# Allegro board PMU851_IS_L_V1_0_180330.brd
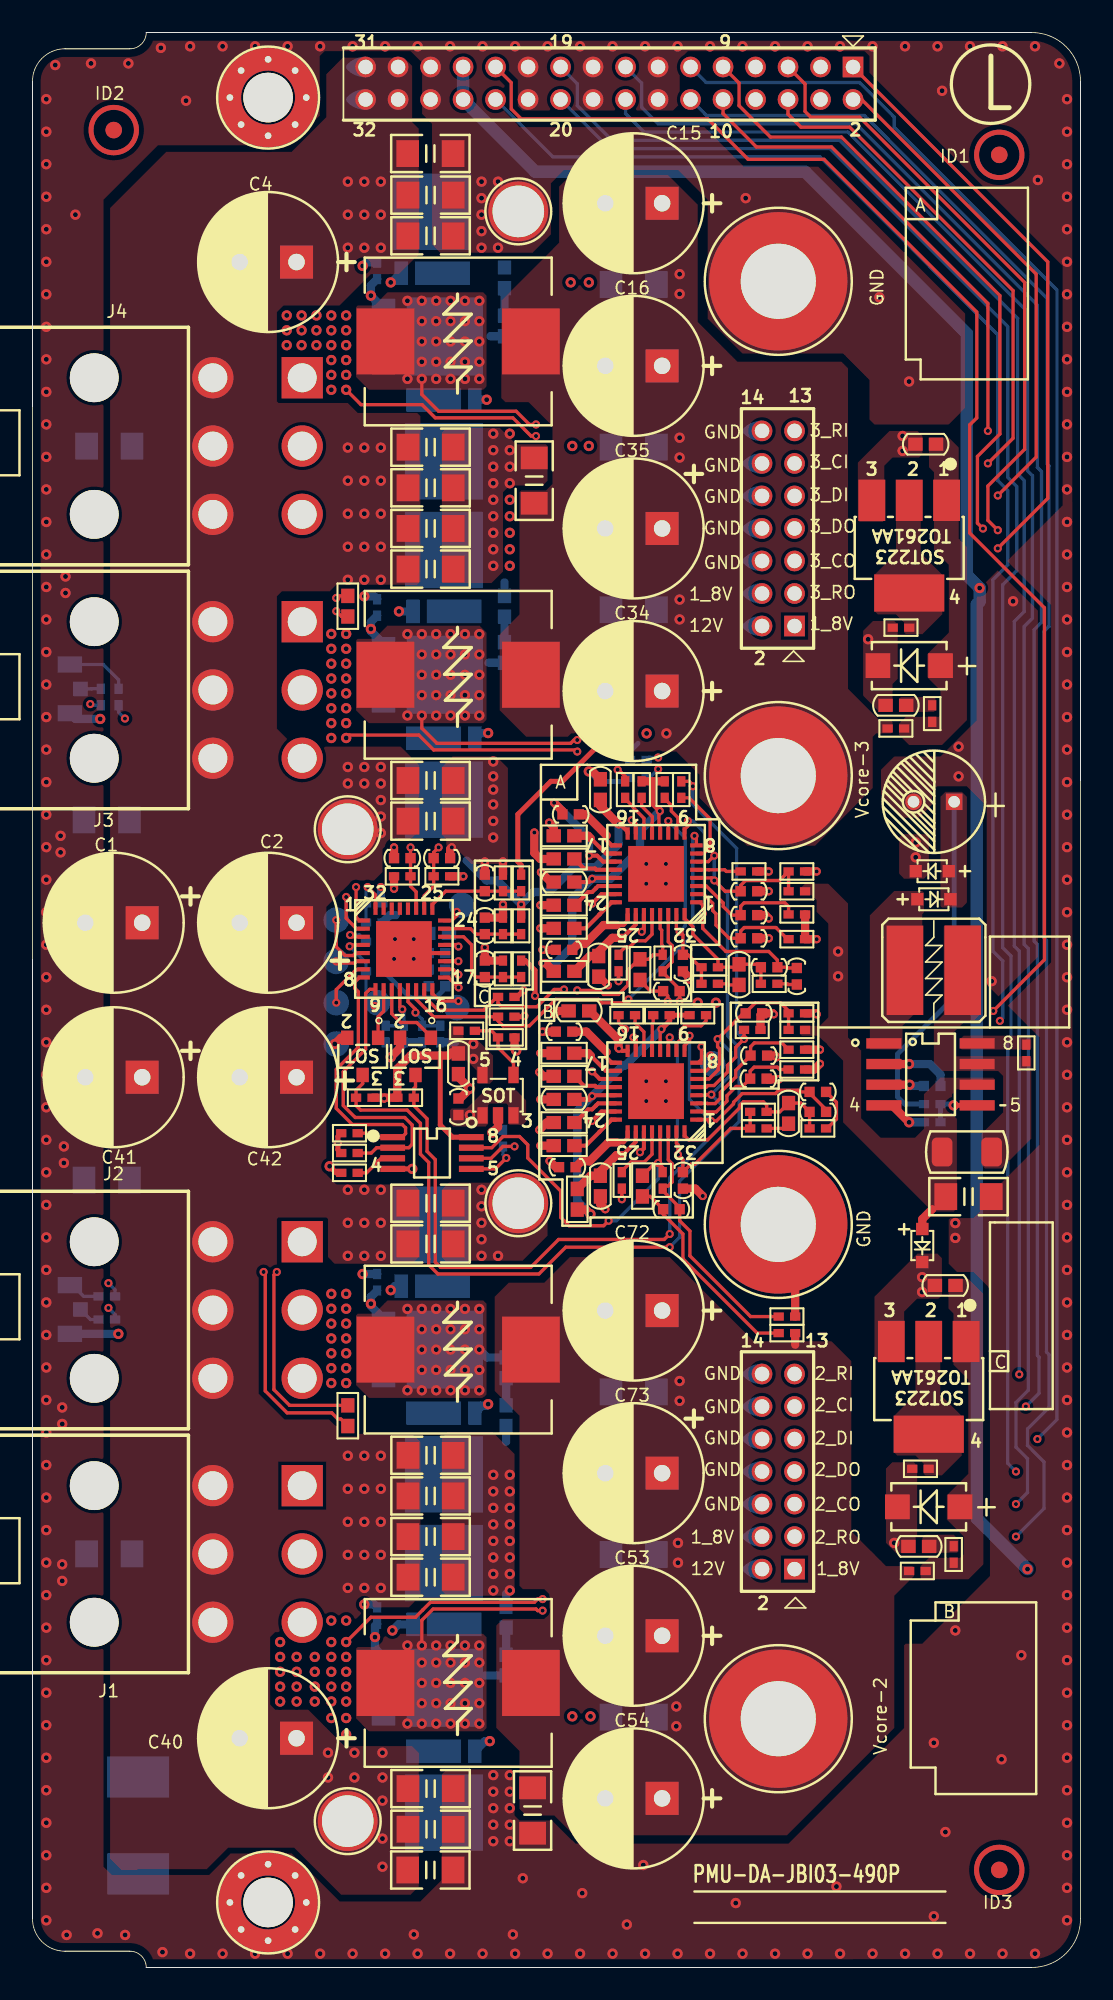
[diagram p0: board, top side]
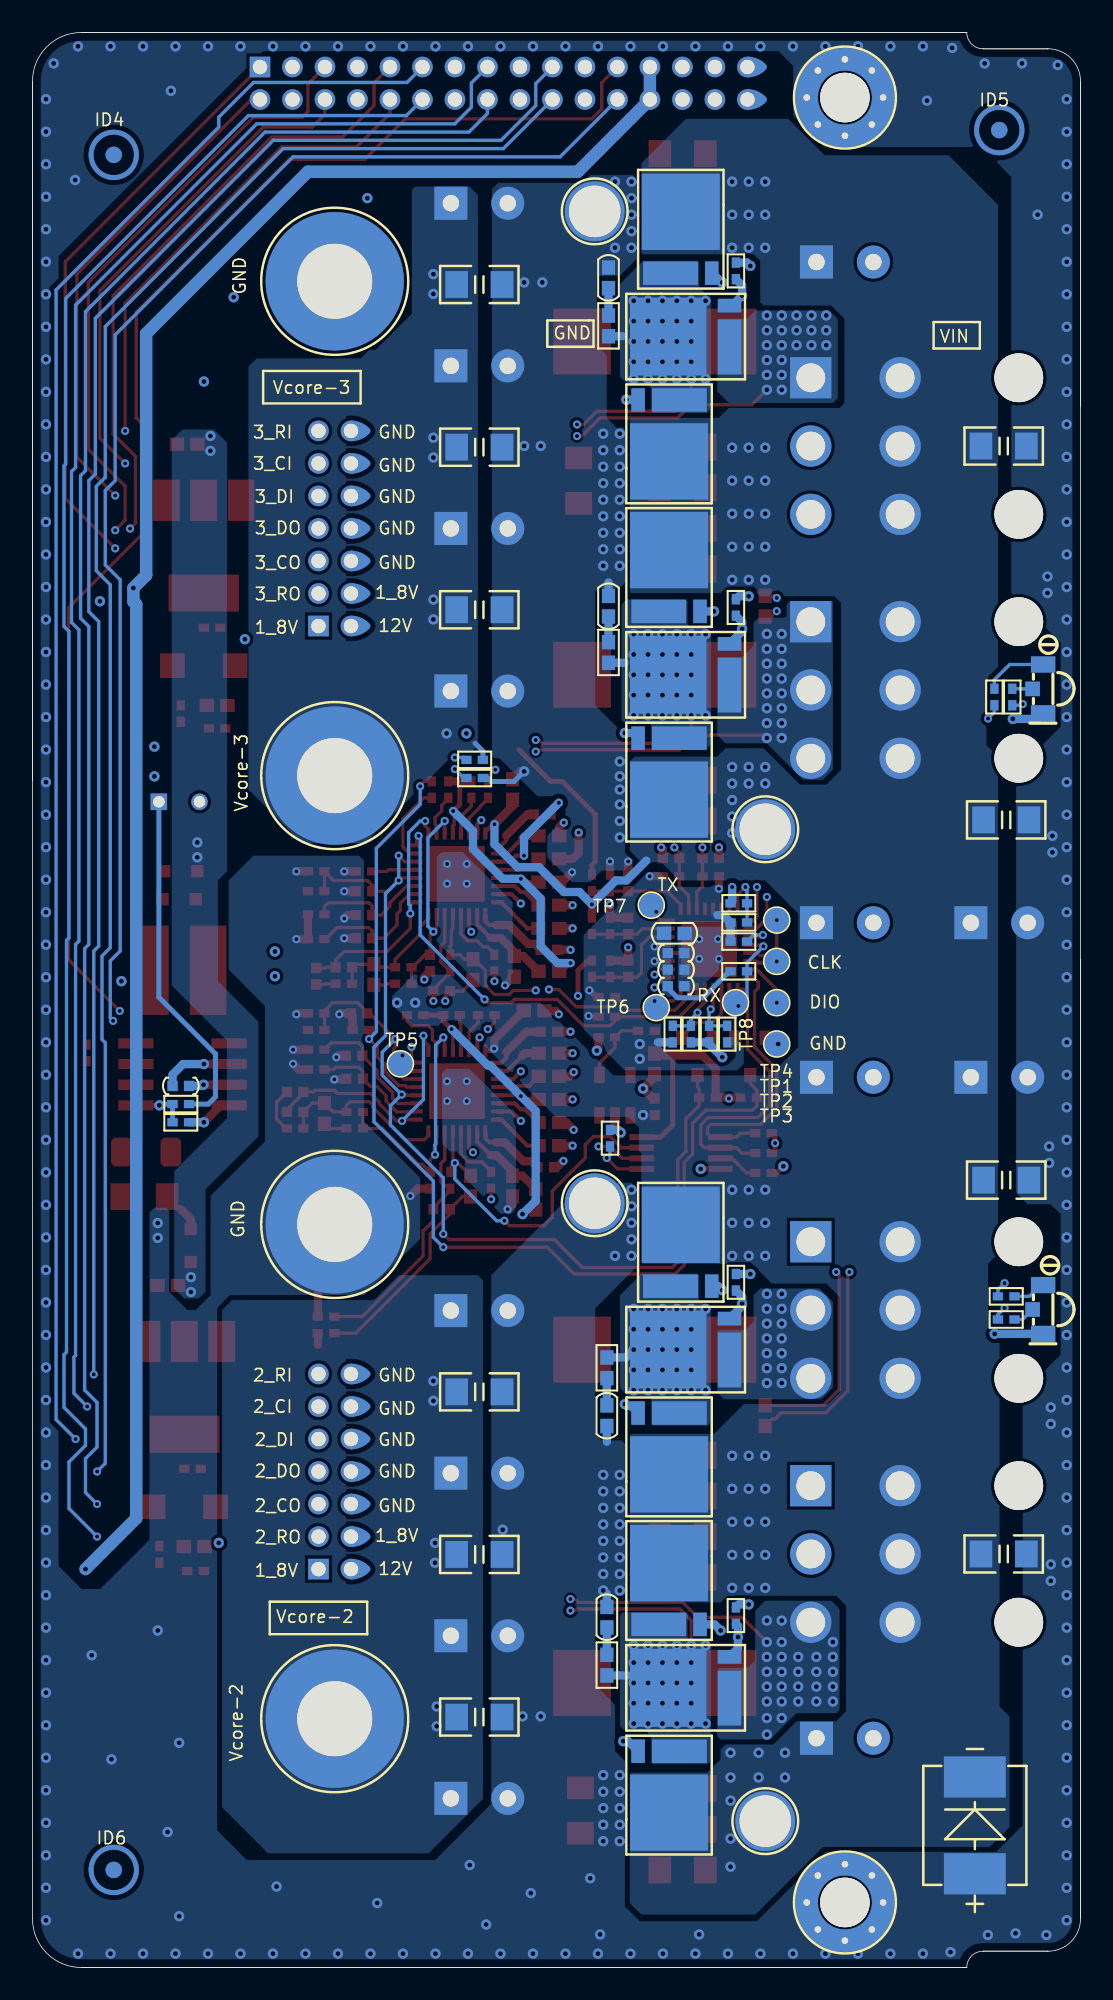
[diagram p1: board, bottom side, seen from below]

Outline 64.5 x 119 mm; copper layers: TOP, L2_INNER, L3_INNER, BOTTOM. Coordinates in mm from the lower left corner of the outline.
Outline path: 0,116 0,96 ; 0,116 arc(0.59,117.41) 2,118 ; 0,116 0,96 ; 0,96 0,62 ; 2,118 6,118 ; 2,118 6,118 ; 0,62 0,28 ; 0,62 0,28 ; 0,28 0,3 ; 0,28 0,3 ; 0,3 arc(0.59,1.59) 2,1 ; 6,118 arc(6.71,118.29) 7,119 ; 2,1 6,1 ; 2,1 6,1 ; 6,1 arc(6.71,0.71) 7,0 ; 7,0 61.5,0 ; 7,0 61.5,0 ; 7,119 61.5,119 ; 7,119 61.5,119 ; 61.5,119 arc(63.62,118.12) 64.5,116 ; 61.5,0 arc(63.62,0.88) 64.5,3 64.5,73 ; 64.5,116 64.5,73 ; 64.5,116 64.5,73

## Placement (name value [footprint] x y rotation side)
C1  270uF/16V  [CE-138-315-315]  5 64.25 0 top
C2  270uF/16V  [CE-138-315-315]  14.5 64.25 0 top
C4  270uF/16V  [CE-138-315-315]  14.5 104.88 0 top
C5  22uF/16V  [C1206]  4.57 48.42 0 bottom
C6  22uF/16V  [C1206]  24.49 111.56 180 top
C7  22uF/16V  [C1206]  4.73 93.57 0 bottom
C8  22uF/16V  [C1206]  24.5 106.5 180 top
C9  22uF/16V  [C1206]  24.5 109 180 top
C10  22uF/16V  [C1206]  24.5 91 180 top
C11  22uF/16V  [C1206]  24.5 93.5 180 top
C12  470nF/16V  [C0402]  32.72 62.59 90 top
C13  2.2uF/10V  [C0603]  34.85 61.57 90 top
C14  10uF/10V  [C0603]  32.72 66.75 0 top
C15  270uF/16V  [CE-138-315-315]  37 108.5 0 top
C16  270uF/16V  [CE-138-315-315]  37 98.5 0 top
C17  22uF/16V  [C1206]  30.88 91.44 270 top
C18  4.7nF/50V/NL  [C0603]  29.05 83.72 270 bottom
C19  10nF/16V  [C0402]  44.09 66.19 270 top
C20  22uF/16V  [C1206]  37 103.5 0 bottom
C21  4.7uF/16V  [C0603]  34.95 72.44 270 top
C22  1nF/50V  [C0402]  44.09 63.3 270 top
C23  150pF/50V  [C0402]  45.34 61.51 90 top
C24  2.2nF/50V  [C0402]  47.04 60.96 180 top
C25  1nF/50V  [C0402]  44.09 64.72 270 top
C26  15nF/25V  [C0603]  43.48 61.06 270 top
C27  100pF/50V  [C0402]  40.03 61.77 180 top
C28  22uF/16V  [C1206]  24.5 73 180 top
C29  22uF/16V  [C1206]  24.5 88.5 180 top
C30  22uF/16V  [C1206]  24.5 70.5 180 top
C31  22uF/16V  [C1206]  24.5 86 180 top
C32  100nF/16V  [C0402]  39.32 60.05 270 top
C33  470nF/16V  [C0402]  33.12 70.92 90 top
C34  270uF/16V  [CE-138-315-315]  37 78.5 0 top
C35  270uF/16V  [CE-138-315-315]  37 88.5 0 top
C36  22uF/16V  [C1206]  37 83.5 0 bottom
C37  22uF/16V  [C1206]  37 93.5 0 bottom
C38  4.7nF/50V/NL  [C0603]  29.05 103.91 270 bottom
C40  270uF/16V  [CE-138-315-315]  14.5 14.1 0 top
C41  270uF/16V  [CE-138-315-315]  5 54.75 0 top
C42  270uF/16V  [CE-138-315-315]  14.5 54.75 0 top
C43  22uF/16V  [C1206]  4.57 70.58 0 bottom
C44  22uF/16V  [C1206]  4.73 25.43 0 bottom
C45  22uF/16V  [C1206]  24.49 5.99 180 top
C46  22uF/16V  [C1206]  24.5 26.5 180 top
C47  22uF/16V  [C1206]  24.5 24 180 top
C48  22uF/16V  [C1206]  24.5 11 180 top
C49  22uF/16V  [C1206]  24.5 8.5 180 top
C50  470nF/16V  [C0402]  32.92 49.22 90 top
C51  2.2uF/10V  [C0603]  34.95 48.06 90 top
C52  10uF/10V  [C0603]  32.72 53.39 0 top
C53  270uF/16V  [CE-138-315-315]  37 20.4 0 top
C54  270uF/16V  [CE-138-315-315]  37 10.4 0 top
C55  22uF/16V  [C1206]  37 15.4 0 bottom
C56  22uF/16V  [C1206]  30.78 9.65 90 top
C57  4.7uF/16V  [C0603]  33.63 58.83 0 top
C58  4.7nF/50V/NL  [C0603]  29.15 21.54 270 bottom
C59  10nF/16V  [C0402]  44.4 58.68 270 top
C60  1nF/50V  [C0402]  44.68 54.66 270 top
C61  150pF/50V  [C0402]  48.33 52.62 90 top
C62  2.2nF/50V  [C0402]  48.33 53.85 270 top
C63  1nF/50V  [C0402]  44.7 56.08 270 top
C64  15nF/25V  [C0603]  46.53 52.53 270 top
C65  100pF/50V  [C0402]  40.03 48.41 180 top
C66  22uF/16V  [C1206]  24.5 47 180 top
C67  22uF/16V  [C1206]  24.5 44.5 180 top
C68  22uF/16V  [C1206]  24.5 31.5 180 top
C69  22uF/16V  [C1206]  24.5 29 180 top
C70  100nF/16V  [C0402]  39.32 46.63 270 top
C71  470nF/16V  [C0402]  32.72 57.55 90 top
C72  270uF/16V  [CE-138-315-315]  37 40.4 0 top
C73  270uF/16V  [CE-138-315-315]  37 30.4 0 top
C74  22uF/16V  [C1206]  37 25.4 0 bottom
C75  22uF/16V  [C1206]  37 35.4 0 bottom
C76  4.7nF/50V/NL  [C0603]  29.15 33.93 90 bottom
C77  100nF/16V  [C0402]  26.21 52.93 0 top
C78  2.2uF/10V  [C0603]  26.21 55.58 90 top
C79  100nF/16V  [C0402]  25.2 68.22 270 top
C80  100nF/16V  [C0402]  22.76 68.22 90 top
C81  100nF/16V  [C0402]  27.84 64.06 0 top
C82  100nF/16V  [C0402]  27.84 66.7 0 top
C83  100nF/16V  [C0402]  27.84 61.42 0 top
C84  100nF/16V  [C0402]  24.89 60.35 270 bottom
C85  100nF/16V  [C0402]  24.89 62.38 270 bottom
C86  100nF/16V  [C0402]  24.89 61.37 270 bottom
C88  10uF/10V  [C0603]  24.99 63.6 0 bottom
C93  1.0uF/25V  [C0603]  54.97 93.68 180 top
C94  10uF/6.3V  [C0603]  53.14 77.62 0 top
C95  1.0uF/25V  [C0603]  56.17 41.95 180 top
C96  10uF/6.3V  [C0603]  54.55 25.89 0 top
C205  100pF/50V  [C0402]  55.37 54.21 90 bottom
C207  22uF/25V  [C1206]  57.61 47.41 180 top
C208  100uF/25V  [DCC-98-248-236]  55.47 71.69 180 top
D1  LTST-S326KGJRKT  [LED_S326KGJRKT_P03]  2.3 78.63 180 bottom
D2  LTST-S326KGJRKT  [LED_S326KGJRKT_P03]  2.3 40.47 180 bottom
D28  NSR1020MW2  [SOD323-2-43S]  54.76 44.4 90 top
D29  NSR1020MW2  [SOD323-2-43S]  55.47 65.7 180 top
D30  NSR1020MW2  [SOD323-2-43S]  55.37 67.42 0 top
H1  Hole  [HOLE120CIR240NP]  14.5 4 0 top
H2  Hole  [HOLE120CIR240NP]  14.5 115 0 top
H3  Hole  [HOLE125CIR145D]  19.4 70 0 top
H5  Hole  [HOLE125CIR145D]  29.9 47 0 top
H6  Hole  [HOLE125CIR145D]  29.9 108 0 top
H7  Hole  [HOLE-M4-182-335]  45.9 45.7 0 top
H8  Hole  [HOLE-M4-182-335]  45.9 103.7 0 top
H9  Hole  [HOLE-M4-182-335]  45.9 73.3 0 top
H10  Hole  [HOLE-M4-182-335]  45.9 15.3 0 top
H11  Hole  [HOLE125CIR145D]  19.4 9 0 top
ID1  MISC_ID  [ID-MARK]  59.5 111.48 0 top
ID2  MISC_ID  [ID-MARK]  5 113 0 top
ID3  MISC_ID  [ID-MARK]  59.5 6 0 top
ID4  MISC_ID  [ID-MARK]  59.5 111.48 180 bottom
ID5  MISC_ID  [ID-MARK]  5 113 180 bottom
ID6  MISC_ID  [ID-MARK]  59.5 6 180 bottom
J1  HDR3x2  [HDR_3X2_P]  16.6 29.63 270 top
J2  HDR3x2  [HDR_3X2_P]  16.6 44.63 270 top
J3  HDR3x2  [HDR_3X2_P]  16.6 82.77 270 top
J4  HDR3x2  [HDR_3X2_P]  16.6 97.77 270 top
J5  CON14A  [HEAD2X7-79B]  45.9 88.5 0 top
J6  CON14A  [HEAD2X7-79B]  45.9 30.5 0 top
J7  CON_2X16  [HEAD2X16-79B]  35.5 115.88 90 top
L1  0.68uH  [IND_10X10_4]  26.2 79.5 0 top
L2  0.68uH  [IND_10X10_4]  26.2 100 0 top
L3  0.68uH  [IND_10X10_4]  26.2 17.5 0 top
L4  0.68uH  [IND_10X10_4]  26.2 38 0 top
L6  33uH  [PL0505-045]  55.47 61.33 180 top
NOREF  -  []  -79.04 -9.53 0 top
NOREF#2  -  []  3.05 39.47 90 top
NOREF#3  -  []  1.81 38.97 90 top
NOREF#4  -  []  1.8 41.43 0 top
NOREF#5  -  []  1.81 77.13 90 top
NOREF#6  -  []  3.05 77.63 90 top
NOREF#7  -  []  3.08 76.63 90 top
NOREF#8  -  []  2.1 78.97 0 top
NOREF#9  -  []  3.08 38.47 90 top
NOREF#10  -  []  2.1 40.81 0 top
NOREF#11  -  []  1.8 79.6 0 top
Q1  TPH1R403NL  [SOT669_TOSHIBA]  25.32 86.1 270 bottom
Q2  TPH1R403NL  [SOT669_TOSHIBA]  25.32 72.9 90 bottom
Q3  TPH1R403NL  [SOT669_TOSHIBA]  24.3 79.5 180 bottom
Q4  TPH1R403NL  [SOT669_TOSHIBA]  25.32 93.7 90 bottom
Q5  TPH1R403NL  [SOT669_TOSHIBA]  24.6 106.9 270 bottom
Q6  TPH1R403NL  [SOT669_TOSHIBA]  24.3 100.3 180 bottom
Q7  TPH1R403NL  [SOT669_TOSHIBA]  25.32 10.6 90 bottom
Q8  TPH1R403NL  [SOT669_TOSHIBA]  25.32 23.8 270 bottom
Q9  TPH1R403NL  [SOT669_TOSHIBA]  24.3 17.2 180 bottom
Q10  TPH1R403NL  [SOT669_TOSHIBA]  25.32 31.4 90 bottom
Q11  TPH1R403NL  [SOT669_TOSHIBA]  24.6 44.6 270 bottom
Q12  TPH1R403NL  [SOT669_TOSHIBA]  24.3 38 180 bottom
Q13  NTR4003N  [SOT23-3-43]  20.32 56.03 180 top
Q14  NTR4003N  [SOT23-3-43]  23.57 56.03 180 top
R1  2.2R  [R0603]  32.72 61.26 180 top
R2  0R  [R0402]  37.29 74.27 0 bottom
R3  732R/1%  [R0402]  36.07 61.77 270 top
R4  1R/NL  [R0603]  29.05 80.87 90 bottom
R5  15K/1%  [R0402]  47.04 66.19 180 top
R6  0R  [R0402]  37.29 73.15 0 bottom
R7  2K  [R0402]  21.21 83.64 90 bottom
R8  0R  [R0603]  32.72 63.91 180 top
R9  5.23K/1%  [R0402]  47.04 67.41 0 top
R10  0R  [R0603]  32.72 65.33 180 top
R11  10K/1%  [R0402]  47.04 63.24 0 top
R12  10K/1%  [R0402]  45.34 60.5 180 top
R13  10K/1%  [R0402]  47.04 64.77 0 top
R14  45.3R/1%  [R0402]  41.68 60.5 0 top
R15  1K/1%  [R0402]  41.68 61.51 0 top
R16  1.13K/1%  [R0603]  37.39 61.37 270 top
R17  78.7R/1%  [R0402]  38.79 61.77 270 top
R18  187K/1%  [R0402]  44.09 67.41 0 top
R19  0R  [R0603]  32.72 69.6 180 top
R20  0R/NL  [R0402]  39.93 72.44 270 top
R21  0R  [R0603]  32.72 68.17 180 top
R22  1R/NL  [R0603]  29.05 100.96 90 bottom
R23  732R/1%  [R0402]  36.47 72.44 90 top
R24  10K  [R0402]  37.49 72.44 270 top
R25  2K  [R0402]  21.21 104.34 90 bottom
R26  2.2R  [R0603]  33.53 47.24 270 top
R27  0R  [R0402]  46.43 39.01 180 top
R28  732R/1%  [R0402]  36.27 48.41 270 top
R29  1R/NL  [R0603]  29.15 18.6 90 bottom
R30  0R  [R0402]  46.43 40.03 180 top
R31  15K/1%  [R0402]  47.04 57.66 180 top
R32  5.23K/1%  [R0402]  47.04 58.68 0 top
R33  2K  [R0402]  21.21 21.64 90 bottom
R34  0R  [R0603]  32.72 50.54 180 top
R35  0R  [R0603]  32.72 51.96 180 top
R36  13.7K/1%  [R0402]  47.04 55.23 0 top
R37  10K/1%  [R0402]  48.33 51.6 180 top
R38  13.7K/1%  [R0402]  47.04 56.44 0 top
R39  45.3R/1%  [R0402]  44.68 51.6 0 top
R40  1K/1%  [R0402]  44.68 52.62 0 top
R41  1.13K/1%  [R0603]  37.54 48.06 270 top
R42  78.7R/1%  [R0402]  38.79 48.41 270 top
R44  0R  [R0603]  32.72 56.23 180 top
R46  0R  [R0603]  32.72 54.81 180 top
R47  1R/NL  [R0603]  29.15 36.88 270 bottom
R48  732R/1%  [R0402]  36.58 58.57 180 top
R49  10K  [R0402]  38.71 58.57 180 top
R50  2K  [R0402]  21.21 42.14 90 bottom
R51  4.7K  [R0402]  19.51 50.09 0 top
R52  4.7K  [R0402]  19.51 51.31 0 top
R53  220R  [R0402]  4.2 78.13 270 bottom
R54  220R  [R0402]  5.3 78.13 270 bottom
R55  220R  [R0402]  4.57 39.85 0 bottom
R56  220R  [R0402]  4.57 41.27 0 bottom
R57  4.53K/1%  [R0402]  19.51 48.87 180 top
R58  4.53K/1%  [R0402]  28.96 51 90 bottom
R61  4.7K/1%  [R0402]  26.72 57.61 180 top
R62  2.8K/1%  [R0402]  29.16 57.2 180 top
R63  10K/NL  [R0402]  20.42 53.49 0 top
R64  10K/NL  [R0402]  22.96 53.49 180 top
R65  820R/1%  [R0402]  25.2 67.11 180 top
R66  820R/1%  [R0402]  22.76 67.11 0 top
R67  10K  [R0402]  29.16 59.69 0 top
R68  10K  [R0402]  29.16 58.47 0 top
R69  20K/1%  [R0402]  30.07 64.06 90 top
R70  5.62K/1%  [R0402]  28.96 64.06 270 top
R71  43K/1%  [R0402]  30.07 66.7 90 top
R72  43K/1%  [R0402]  30.07 61.42 90 top
R73  20K/1%  [R0402]  28.96 66.7 270 top
R74  20K/1%  [R0402]  28.96 61.42 270 top
R75  47K  [R0402]  21.03 63.09 0 bottom
R76  47K  [R0402]  21.03 61.26 0 bottom
R77  10K/NL  [R0402]  23.98 57.4 90 bottom
R78  10K/NL  [R0402]  22.86 57.4 90 bottom
R79  0R/NL  [R0402]  40.94 58.57 0 top
R80  0R/NL  [R0402]  38.91 72.44 270 top
R81  187K/1%  [R0402]  44.3 57.66 0 top
R87  0R  [R0402]  53.14 76.2 0 top
R88  0R  [R0402]  55.37 77.11 90 top
R89  0R  [R0402]  53.45 82.4 180 top
R92  0R  [R0402]  54.46 24.38 180 top
R93  0R  [R0402]  56.69 25.4 90 top
R94  0R  [R0402]  54.65 30.67 180 top
R198  180R  [R0402]  61.16 56.25 90 top
R201  0.33R  [R1206]  57.51 50.15 180 top
R203  75K/1%  [R0402]  55.37 53.1 180 bottom
R204  7.32K/1%  [R0402]  55.37 51.98 180 bottom
R205  10K/NL  [R0402]  25.1 57.4 270 bottom
R206  10K/NL  [R0402]  21.74 57.4 270 bottom
R207  10K/NL  [R0402]  21.03 64.27 0 bottom
R208  10K/NL  [R0402]  21.03 65.45 180 bottom
RT1  NTC  [R0603]  19.41 33.93 90 top
RT2  NTC  [R0603]  19.41 83.72 270 top
TP1  TP  [SMD_TP_2]  18.69 61.87 180 bottom
TP2  TP  [SMD_TP_2]  18.69 59.33 180 bottom
TP3  TP  [SMD_TP_2]  18.69 56.79 180 bottom
TP4  TP  [SMD_TP_2]  18.69 64.41 180 bottom
TP5  TP  [SMD_TP_2]  41.86 55.58 0 bottom
TP6  TP  [SMD_TP_2]  26.11 59.03 180 bottom
TP7  TP  [SMD_TP_2]  26.42 65.33 180 bottom
TP8  TP  [SMD_TP_2]  21.23 59.33 180 bottom
TVS1  SMCJ16A  [D3224-105]  6.5 8.74 90 bottom
TVS5  SMAJ5.0A  [D2010-89]  53.96 80.06 180 top
TVS8  SMAJ5.0A  [D2010-89]  55.16 28.33 180 top
U1  ISL8120  [QFN32-050-0505-010-N]  38.38 67.26 180 top
U2  ISL8120  [QFN32-050-0505-010-N]  38.38 53.89 180 top
U3  DS4412  [SOP8-26-120-43]  24.59 50.09 0 top
U4  AP2204  [SOT25-5-57]  28.65 53.64 0 top
U7  LPC824M101JHI33  [QFN32-050-0505-010-N]  22.86 62.64 0 top
U9  AZ1117  [SOT223-4-71]  53.96 87.38 180 top
U10  AZ1117  [SOT223-4-71]  55.16 35.65 180 top
U15  MC34063A  [SO-8]  55.27 54.93 270 top

## Library data of the parts
C1 C2 C4 C15 C16 C34 C35 C40-C42 C53 C54 C72 C73 C208 = CAPACITOR_0
C5 C7 C8 C28 C43 C45 C46 C66 C207 = C1206-22uF/16V
C6 C9-C14 C17-C27 C29-C33 C36-C38 C44 C47-C52 C55-C65 C67-C71 C74-C77 C79-C86 C88 C93-C96 = C
C78 = C0402-2.2uF/6.3V
C205 = C0402-0.1uF/16V
D1 D2 = LED,HT-155UD_UYG_0
D28-D30 TVS1 TVS5 TVS8 = DIODE SCHOTTKY
H1 H2 = Hole_0
H3 H5-H11 = Hole
ID1-ID6 = MISC_ID
J1-J4 = HDR3x2
J5 J6 = CON14A
J7 = CON_2X16
L1-L4 = L,2.2uH,VLS252012T-2R2M1R3
L6 = PL0606-027-4.7uH
Q1-Q12 = IRL3803
Q13 Q14 = MFE825_1
R1-R42 R44 R46-R52 R57 R58 R69-R74 R79-R81 R87-R89 R92-R94 R203 R204 = R
R53-R56 = R_0
R61 = R0402-4.7K
R62 = R0402-2.8K/1%
R63 R64 R67 R68 R75-R78 R205-R208 = R0402-10K_1
R65 R66 R198 = R0402-820R
R201 = R: Tolerance: ***
RT1 RT2 = NTC
TP1-TP8 = TEST POINT, SMD circle 35 mils
U1 U2 = IC_REG_ISL8120
U3 = IC_DAC_DS4412
U4 = AP2204/ADJ
U7 = IC_ARM_LPC822M101JHI33
U9 U10 = IC_LDO_AZ1117-ADJ
U15 = IC_MC34063A

## Footprints (pads in the part's own frame, mm; a bottom-side part is the same pattern mirrored in y, then rotated)
C0402
  rect 0.635x0.635 smd: 1(0,0.508) 2(0,-0.508)
C0603
  rect 0.889x0.813 smd: 1(-0.635,0) 2(0.635,0)
C1206
  rect 1.397x1.651 smd: 1(-1.397,0) 2(1.397,0)
CE-138-315-315
  rect 2.032x2.032 hole 1.016: 1(1.75,0)
  round 2.032 hole 1.016: 2(-1.75,0)
D2010-89
  rect 1.524x1.524 smd: 1(-1.928,0) 2(1.928,0)
D3224-105
  rect 2.54x3.81 smd: 1(-2.979,0) 2(2.979,0)
DCC-98-248-236
  rect 1.016x1.016 hole 0.711: 1(-1.25,0)
  round 1.016 hole 0.711: 2(1.25,0)
HDR_3X2_P
  round 3 hole 3 unplated: (0,-12.8) (8.4,-12.8)
  rect 2.54x2.54 hole 1.778: 1(0,0)
  round 2.54 hole 1.778: 2(4.2,0) 3(8.4,0) 4(8.4,-5.5) 5(4.2,-5.5) 6(0,-5.5)
HEAD2X7-79B
  rect 1.27x1.27 hole 0.889: 1(1,-6)
  round 1.27 hole 0.889: 2(-1,-6) 3(1,-4) 4(-1,-4) 5(1,-2) 6(-1,-2) 7(1,0) 8(-1,0) 9(1,2) 10(-1,2) 11(1,4) 12(-1,4) 13(1,6) 14(-1,6)
HEAD2X16-79B
  rect 1.27x1.27 hole 0.889: 1(1,-15)
  round 1.27 hole 0.889: 2(-1,-15) 3(1,-13) 4(-1,-13) 5(1,-11) 6(-1,-11) 7(1,-9) 8(-1,-9) 9(1,-7) 10(-1,-7) 11(1,-5) 12(-1,-5) 13(1,-3) 14(-1,-3) 15(1,-1) 16(-1,-1) 17(1,1) 18(-1,1) 19(1,3) 20(-1,3) 21(1,5) 22(-1,5) 23(1,7) 24(-1,7) 25(1,9) 26(-1,9) 27(1,11) 28(-1,11) 29(1,13) 30(-1,13) 31(1,15) 32(-1,15)
HOLE120CIR240NP
  round 3.048 hole 3.048 unplated: (0,0)
  round 0.711 hole 0.406: 1(0,2.349) 2(-1.661,1.661) 3(-2.349,0) 4(-1.661,-1.661) 5(0,-2.349) 6(1.661,-1.661) 7(2.349,0) 8(1.661,1.659)
HOLE125CIR145D
  round 3.683 hole 3.175: 1(0,0)
HOLE-M4-182-335
  round 8.509 hole 4.623: 1(0,0)
ID-MARK
  round 1.016 smd: 1(0,0)
IND_10X10_4
  rect 3.556x4.064 smd: 1(-4.478,0) 2(4.478,0)
LED_S326KGJRKT_P03
  rect 1.5x1 smd: 1(0,1.5) 2(0,-1.5)
  rect 0.9x0.9 smd: 3(-0.65,0)
PL0505-045
  rect 2.254x5.5 smd: 1(-1.778,0) 2(1.778,0)
QFN32-050-0505-010-N
  rect 0.762x0.254 smd: 1(-2.481,1.75) 2(-2.481,1.25) 3(-2.481,0.75) 4(-2.481,0.25) 5(-2.481,-0.25) 6(-2.481,-0.75) 7(-2.481,-1.25) 8(-2.481,-1.75) 17(2.481,-1.75) 18(2.481,-1.25) 19(2.481,-0.75) 20(2.481,-0.25) 21(2.481,0.25) 22(2.481,0.75) 23(2.481,1.25) 24(2.481,1.75)
  rect 0.254x0.762 smd: 9(-1.75,-2.481) 10(-1.25,-2.481) 11(-0.75,-2.481) 12(-0.25,-2.481) 13(0.25,-2.481) 14(0.75,-2.481) 15(1.25,-2.481) 16(1.75,-2.481) 25(1.75,2.481) 26(1.25,2.481) 27(0.75,2.481) 28(0.25,2.481) 29(-0.25,2.481) 30(-0.75,2.481) 31(-1.25,2.481) 32(-1.75,2.481)
  rect 3.429x3.429 smd: 33(0,0)
R0402
  rect 0.635x0.508 smd: 1(-0.508,0) 2(0.508,0)
R0603
  rect 0.889x0.813 smd: 1(-0.635,0) 2(0.635,0)
R1206
  custom 1.27x1.778 smd: 1(-1.524,0) 2(1.524,0)
SMD_TP_2
  round 1.575 smd: 1(0,0)
SO-8
  rect 0.635x2.159 smd: 1(-1.905,-2.87) 2(-0.635,-2.87) 3(0.635,-2.87) 4(1.905,-2.87) 5(1.905,2.87) 6(0.635,2.87) 7(-0.635,2.87) 8(-1.905,2.87)
SOD323-2-43S
  rect 0.762x0.762 smd: 1(1.016,0) 2(-1.016,0)
SOP8-26-120-43
  rect 1.524x0.381 smd: 1(-2.419,0.975) 2(-2.419,0.325) 3(-2.419,-0.325) 4(-2.419,-0.975) 5(2.419,-0.975) 6(2.419,-0.325) 7(2.419,0.325) 8(2.419,0.975)
SOT23-3-43
  rect 0.762x0.889 smd: 1(-0.95,-1.143) 2(0.95,-1.143) 3(0,1.143)
SOT25-5-57
  rect 0.635x1.016 smd: 1(-0.953,-1.245) 2(0,-1.245) 3(0.953,-1.245) 4(0.953,1.245) 5(-0.953,1.245)
SOT223-4-71
  rect 1.651x2.54 smd: 1(-2.3,-2.85) 2(0,-2.85) 3(2.3,-2.85)
  rect 4.318x2.286 smd: 4(0,2.85)
SOT669_TOSHIBA
  rect 1.448x0.838 smd: 1(2.7,1.905)
  rect 1.448x3.378 smd: 2(2.7,-0.635)
  rect 4.699x4.801 smd: 3(-1.074,0)

## Nets
1.8V: J5.1 J5.4 J6.1 J6.4 J7.25 J7.26
12V_HASH2: C96.1 J6.2 R94.2 TVS8.2(K)
12V_HASH3: C94.1 J5.2 R89.2 TVS5.2(K)
GND: C1.2 C2.2 C4.2 C5.1 C6.1 C7.1 C8.1 C9.1 C10.1 C11.1 C13.1 C14.1 C15.2 C16.2 C17.1 C18.1 C19.1 C20.1 C21.1 C22.1 C25.1 C27.1 C28.1 C29.1 C30.1 C31.1 C34.2 C35.2 C36.1 C37.1 C38.1 C40.2 C41.2 C42.2 C43.1 C44.1 C45.1 C46.1 C47.1 C48.1 C49.1 C51.1 C52.1 C53.2 C54.2 C55.1 C56.1 C57.1 C58.1 C59.1 C60.1 C63.1 C65.1 C66.1 C67.1 C68.1 C69.1 C72.2 C73.2 C74.1 C75.1 C76.1 C77.1 C78.1 C79.1 C80.1 C81.1 C82.1 C83.1 C84.1 C85.1 C86.1 C88.1 C205.1 C207.1 C208.2 H1.1 H1.2 H1.3 H1.4 H1.5 H1.6 H1.7 H1.8 H2.1 H2.2 H2.3 H2.4 H2.5 H2.6 H2.7 H2.8 H5.1 H6.1 H7.1 H8.1 J1.1 J1.2 J1.3 J2.1 J2.2 J2.3 J3.1 J3.2 J3.3 J4.1 J4.2 J4.3 J5.6 J5.8 J5.10 J5.12 J5.14 J6.6 J6.8 J6.10 J6.12 J6.14 J7.3 J7.4 J7.7 J7.8 J7.13 J7.14 J7.17 J7.18 J7.21 J7.22 J7.27 J7.28 Q3.2(S) Q6.2(S) Q9.2(S) Q12.2(S) Q13.2(S) Q14.2(S) R6.1 R7.2 R9.2 R11.2 R13.2 R18.2 R25.2 R30.1 R32.2 R33.2 R36.2 R38.2 R50.2 R57.2 R58.2 R62.1 R70.1 R73.1 R74.1 R77.1 R78.1 R81.2 R204.2 R208.1 RT1.2 RT2.2 TP3.1 TVS1.1(ANODE) U1.15(ISEN2A) U1.27(ISEN1A) U1.33(GND) U2.15(ISEN2A) U2.27(ISEN1A) U2.33(GND) U3.4(GND) U4.2(GND) U7.20(VREFN) U7.33(VSS) U15.2(SWITCH EMITTER) U15.4(GND)
GND_VCORE1: C93.1 R87.2 R88.1 TVS5.1(A) U9.1(ADJ)
GND_VCORE2: C95.1 R92.1 R93.1 TVS8.1(A) U10.1(ADJ)
VCC3V3: C78.2 C84.2 C85.2 C86.2 C88.2 D1.2(ANODE) D2.2(ANODE) R51.1 R52.1 R61.2 R63.2 R64.2 R65.1 R66.1 R67.2 R68.2 R75.2 R76.2 R205.2 R206.2 R207.2 U3.8(VCC) U4.5(VOUT) U7.19(VDD) U7.21(VREFP)
VCC_5V: C14.2 R1.2 R24.1 R80.1 U1.12(VSEN2-) U1.21(PVCC)
VCC_5V_2: C52.2 R26.2 R49.1 R79.1 U2.12(VSEN2-) U2.21(PVCC)
VCC_INPUT: C1.1 C2.1 C4.1 C5.2 C6.2 C7.2 C8.2 C9.2 C10.2 C11.2 C21.2 C28.2 C29.2 C30.2 C31.2 C40.1 C41.1 C42.1 C43.2 C44.2 C45.2 C46.2 C47.2 C48.2 C49.2 C57.2 C66.2 C67.2 C68.2 C69.2 C77.2 C207.2 D28.1(A) H3.1 H11.1 J1.4 J1.5 J1.6 J2.4 J2.5 J2.6 J3.4 J3.5 J3.6 J4.4 J4.5 J4.6 J7.29 J7.30 J7.31 J7.32 Q1.3(D) Q2.3(D) Q4.3(D) Q5.3(D) Q7.3(D) Q8.3(D) Q10.3(D) Q11.3(D) R5.1 R31.1 R69.2 R201.2 TVS1.2(CATHODE) U1.16(VIN) U2.16(VIN) U4.1(VIN) U4.3(EN) U15.6(VCC)
2_BOOT1: C50.2 U2.25(BOOT1)
2_BOOT2: C71.2 U2.17(BOOT2)
2_CI: J6.11 J7.15
2_CO: J6.5 J7.16
2_COMP1: C61.2 C62.2 U2.1(COMP1) U2.9(COMP2)
2_DI: J6.9 J7.11
2_DO: J6.7 J7.20
2_FB1: C61.1 C64.1 R37.2 R40.2 U2.32(FB1)
2_ISEN1B: R28.1 U2.28(ISEN1B)
2_ISEN2B: R48.1 U2.14(ISEN2B)
2_LGATE1: Q9.1(G) R33.1 R35.2
2_LGATE2: Q12.1(G) R46.2 R50.1
2_PHASE1: C50.1 L3.1 Q7.2(S) Q8.2(S) Q9.3(D) R28.2 R29.1 U2.23(PHASE1)
2_PHASE2: C71.1 L4.1 Q10.2(S) Q11.2(S) Q12.3(D) R47.1 R48.2 U2.19(PHASE2)
2_RI: J6.13 J7.19
2_RO: J6.3 J7.12
2_UGATE1: Q7.1(G) Q8.1(G) R34.2
2_UGATE2: Q10.1(G) Q11.1(G) R44.2
2_VMON1: C65.2 R39.1 R40.1 U2.11(VMON2) U2.31(VMON1)
2_VSEN1-: C70.1 R30.2 R42.2 U2.30(VSEN1-)
3_BOOT1: C12.2 U1.25(BOOT1)
3_BOOT2: C33.2 U1.17(BOOT2)
3_CI: J5.11 J7.6
3_CO: J5.5 J7.5
3_COMP1: C23.2 C24.2 U1.1(COMP1) U1.9(COMP2)
3_DI: J5.9 J7.2
3_DO: J5.7 J7.9
3_FB1: C23.1 C26.1 R12.2 R15.2 U1.32(FB1)
3_ISEN1B: R3.1 U1.28(ISEN1B)
3_ISEN2B: R23.1 U1.14(ISEN2B)
3_LGATE1: Q3.1(G) R7.1 R10.2
3_LGATE2: Q6.1(G) R21.2 R25.1
3_PHASE1: C12.1 L1.1 Q1.2(S) Q2.2(S) Q3.3(D) R3.2 R4.1 U1.23(PHASE1)
3_PHASE2: C33.1 L2.1 Q4.2(S) Q5.2(S) Q6.3(D) R22.1 R23.2 U1.19(PHASE2)
3_RI: J5.13 J7.10
3_RO: J5.3 J7.1
3_UGATE1: Q1.1(G) Q2.1(G) R8.2
3_UGATE2: Q4.1(G) Q5.1(G) R19.2
3_VMON1: C27.2 R14.1 R15.1 U1.11(VMON2) U1.31(VMON1)
3_VSEN1-: C32.1 R6.2 R17.2 U1.30(VSEN1-)
AD0: C83.2 R72.1 R74.2 U7.22(PIO0_7/ADC_0)
AD1: C81.2 R69.1 R70.2 U7.23(PIO0_6/ADC_1/VDDCMP)
AD2: C82.2 R71.1 R73.2 U7.25(PIO0_14/ADC_2/ACMP_I3)
AD3: C79.2 R65.2 RT1.1 U7.26(PIO0_23/ADC_3/ACMP_I4)
AD4: C80.2 R66.2 RT2.1 U7.27(PIO0_22/ADC_4)
CLKOUT/REFIN1: R20.1 R81.1 U2.5(FSYNC)
DAC2: R41.1 R42.1 U2.29(VSEN1+) U3.7(OUT1)
DAC3: R16.1 R17.1 U1.29(VSEN1+) U3.6(OUT0)
DAC_SCL: R51.2 U3.2(SCL) U7.9(PIO0_10/I2C0_SCL)
DAC_SDA: R52.2 U3.1(SDA) U7.8(PIO0_11/I2C0_SDA)
DET_BAD_2: R56.2 U7.18(PIO0_8/XTALIN)
DET_BAD_3: R54.2 U7.2(PIO0_12)
DET_GD_2: R55.2 U7.17(PIO0_9/XTALOUT)
DET_GD_3: R53.2 U7.1(PIO0_13/ADC_10)
EN2: C59.2 Q14.3(D) R31.2 R32.1 R64.1 U2.4(EN/VFF1) U2.6(EN/VFF2)
EN3: C19.2 Q13.3(D) R5.2 R9.1 R63.1 U1.4(EN/VFF1) U1.6(EN/VFF2)
EN#_2: Q14.1(G) U7.11(PIO0_27)
EN#_3: Q13.1(G) U7.10(PIO0_16)
PGOOD2: R67.1 U2.8(PGOOD) U7.15(PIO0_15)
PGOOD3: R68.1 U1.8(PGOOD) U7.14(PIO0_24)
POWERIC_DETECT_1: R78.2 R206.1 U7.12(PIO0_26)
POWERIC_DETECT_2: R77.2 R205.1 U7.13(PIO0_25)
POWERIC_DETECT_3: R207.1 R208.2 U7.32(PIO0_17/ADC_9)
RESETN: R75.1 U7.3(PIO0_5/RESET#)
RXD: J7.24 R76.1 TP8.1 U7.4(PIO0_4/ADC_11/TRST#)
SWCLK: TP1.1 U7.6(SWCLK/PIO0_3/TCK)
SWDIO: TP2.1 U7.7(SWDIO/PIO0_2/TMS)
TXD: J7.23 TP7.1 U7.24(PIO0_0/ACMP_I1/TDO)
VBOOST: C93.2 C95.2 D28.2(K) D30.2(K) U9.3(INPUT) U10.3(INPUT)
VCORE_2: C53.1 C54.1 C55.2 C56.2 C72.1 C73.1 C74.2 C75.2 H10.1 L3.2 L4.2 R27.1 R72.2 R92.2
VCORE_3: C15.1 C16.1 C17.2 C20.2 C34.1 C35.1 C36.2 C37.2 H9.1 L1.2 L2.2 R2.1 R71.2 R87.1
VSEN+: C70.2 R27.2 R41.2
VSEN+_1136380: C32.2 R2.2 R16.2
N834568: C25.2 R13.1 U1.3(ISHARE)
N834620: R18.1 U1.5(FSYNC)
N1135406: C24.1 R12.1
N1136069: C26.2 R14.2
N1140436: R80.2 U1.10(FB2)
N1141488: C13.2 R1.1 U1.26(VCC)
N1147878: R24.2 U1.13(VSEN2+)
N1164341: C22.2 R11.1 U1.2(ISET)
N1260942: R61.1 R62.2 U4.4(ADJ)
N1261054: D1.3(C2) R53.1
N1261058: D1.1(C1) R54.1
N1261202: D2.3(C2) R55.1
N1261218: D2.1(C1) R56.1
N1376138: C18.2 R4.2
N1377294: R8.1 U1.24(UGATE1)
N1377298: R10.1 U1.22(LGATE1)
N1377622: R21.1 U1.20(LGATE2)
N1377681: R19.1 U1.18(UGATE2)
N1393549: R20.2 U1.7(CLKOUT/REFIN)
N1433950: R79.2 U2.10(FB2)
N1434422: C51.2 R26.1 U2.26(VCC)
N1435148: C58.2 R29.2
N1435244: R34.1 U2.24(UGATE1)
N1435248: R35.1 U2.22(LGATE1)
N1435290: R46.1 U2.20(LGATE2)
N1435312: R44.1 U2.18(UGATE2)
N1435412: C63.2 R38.1 U2.3(ISHARE)
N1435908: R49.2 U2.13(VSEN2+)
N1436088: C62.1 R37.1
N1436200: C64.2 R39.2
N1436584: C60.2 R36.1 U2.2(ISET)
N1440143: R58.1 U3.5(FS0)
N1440147: R57.1 U3.3(FS1)
N1460471: TP4.1 U7.5(PIO0_28/WKTCLKIN)
N1473037: TP5.1 U2.7(CLKOUT/REFIN)
N1481771: TP6.1 U7.16(PIO0_1/ACMP_12/CLKIN/TDI)
N1699083: R89.1 U9.2(OUTPUT_1) U9.4(OUTPUT_2)
N1699319: R94.1 U10.2(OUTPUT_1) U10.4(OUTPUT_2)
N1699405: C96.2 R93.2
N8312771: C38.2 R22.2
N14347981: C76.2 R47.2
N16743506: C208.1 D29.2(K) D30.1(A) R203.2
N16743564: L6.1 R198.1 R201.1 U15.7(IPK SENSE)
N16743576: D29.1(A) L6.2 U15.1(SWITCH COLLECTOR)
N16743632: R198.2 U15.8(DRIVER COLLECTOR)
N16743688: R203.1 R204.1 U15.5(COMPARATOR INVERTING INPUT)
N16743744: C205.2 U15.3(TIMING CAPACITOR)
N16991230: C94.2 R88.2

Pads without a net: ID1 1; ID2 1; ID3 1; ID4 1; ID5 1; ID6 1; U7 28 29 30 31

## Via types
v1: diameter 0.5, hole 0.25, TOP to BOTTOM, 154 vias
v2: diameter 0.635, hole 0.305, TOP to BOTTOM, 599 vias

## Routing (per net, layer and track width the routed paths; a pad name or vN(x,y) marks a point on that pad's centre or on a via; arc(x,y) is an arc through that point)
1.8V: length 149
  L2_INNER w0.762: v2(58.29,84.84) 49.24,84.84 J5.1 J5.4 ; J6.4 J6.1 v2(61.24,24.5)
  BOTTOM w0.762: v2(61.24,24.5) 58.12,27.62 58.12,83.83 58.29,84.01 v2(58.29,84.84) 57.51,85.62 57.51,100.48 47.55,110.44 30.94,110.44 J7.26 J7.25
12V_HASH2: length 9.9
  L3_INNER w0.762: J6.2 46.24,23.16 50.09,23.16 v2(53.04,26.11)
12V_HASH3: length 7.2
  L3_INNER w0.762: J5.2 46.12,81.28 51.02,81.28 v2(51.43,81.69)
GND: length 279.7
  TOP w0.203: v1(18.69,83.41) 19.02,83.08 RT2.2 ; v1(15.04,42.77) 14.86,42.59 14.86,35.54 15.82,34.57 RT1.2 ; v2(19.3,75.61) 19.33,75.61 19.51,75.79 23.77,75.79 24.69,74.88 33.43,74.88 v1(33.53,74.78) ; v2(19.3,20.01) 20.83,21.54 23.57,21.54 24.01,21.98 24.49,22.45 30.89,22.45 31.09,22.66 v1(31.39,22.66) ; v2(19.3,97.03) 20.22,96.11 23.98,96.11 24.79,95.3 29.57,95.3 30.68,94.18 v1(30.99,94.18)
  TOP w0.25: v1(23.47,62.03) 23.82,62.39 U7.20 ; v1(36.98,57.2) 37.13,57.05 U2.15 ; U2.27 37.63,50.37 v1(37.39,50.13) ; v1(36.88,70.56) 37.13,70.31 U1.15 ; v1(37.5,63.7) 37.5,63.71 37.63,63.84 U1.27
  TOP w0.305: R57.2 18.69,48.87 v2(18.29,49.28) ; U3.4 v2(23.37,49.11)
  TOP w0.45: C13.1 34.88,60.93 v1(35.42,60.4)
  TOP w0.508: C57.1 32.31,58.83 v1(32.11,58.62) ; R13.2 R11.2 v1(48.26,63.24) ; v1(41.25,47.45) 40.8,47.9 C65.1 ; v2(34.24,73.56) 34.47,73.56 C21.1 ; U4.2 28.65,51.7 v2(28.3,51.35) ; C52.1 v1(31.26,53.39) ; Q13.2 18.99,57.18 v2(18.61,56.79) ; R62.1 29.67,56.49 v2(29.77,56.39) ; v2(53.95,51.98) 52.91,53.02 U15.4 ; C78.1 26.21,54.76 v2(26.92,54.05) 26.31,53.44 C77.1 ; Q14.2 22.62,56.56 v2(22.05,55.98) ; C27.1 40.39,60.91 v1(40.39,60.76) ; C81.1 R70.1 v1(28.96,65.38) ; v1(48.46,55.58) 48.11,55.23 R36.2 ; R30.1 46.94,44.66 H7.1 ; v1(31.29,67.36) 31.9,66.75 C14.1 ; C60.1 45.23,54.62 v1(45.92,54.62) ; v1(45.62,58.62) 45.56,58.68 C59.1 44.81,58.58 R81.2 ; C82.1 v1(27.84,68.02) ; C19.1 v1(45.31,66.19) ; v1(48.26,58.62) 48.2,58.68 R32.2 ; R73.1 v1(28.96,68.02) ; C25.1 45.11,64.72 v1(45.31,64.52) ; v1(45.8,55.98) 45.7,56.08 C63.1 ; v1(27.84,62.74) C83.1 R74.1 ; C79.1 25.7,68.78 v1(25.81,68.88) ; U15.2 v2(53.95,55.56) ; R9.2 v1(48.26,67.41) ; C51.1 34.95,46.94 v1(35.26,46.63) ; C80.1 v1(22.25,68.88) ; v1(45.31,63.3) C22.1 ; v1(48.46,56.44) R38.2 ; R18.2 v1(45.31,67.41)
  L2_INNER w0.203: v1(33.53,74.78) 33.65,74.9 34.76,74.9 35.05,74.61 35.05,66.14 v1(37.5,63.7) ; v1(15.04,42.77) 14.73,43.08 14.73,47.89 20.32,53.48 20.32,60.35 21.34,61.37 21.34,63.5 25.6,67.77 25.6,68.68 v1(25.81,68.88) ; v1(36.98,57.2) 36.68,56.9 36.68,51.98 32.92,48.23 32.92,45.18 29.8,42.06 23.76,42.06 21.82,40.13 19.69,40.13 v2(19.3,40.51)
  L3_INNER w0.203: v1(18.69,83.41) 17.58,84.53 15.75,84.53 13.72,82.5 13.72,71.59 17.54,67.77 21.13,67.77 v1(22.25,68.88) ; v1(31.39,22.66) 31.06,23 31.06,29.63 33.02,31.6 33.02,40.57 36.88,44.43 36.88,49.63 v1(37.39,50.13) ; v1(30.99,94.18) 31.29,93.88 31.29,86.19 33.43,84.06 33.43,77.76 35.46,75.73 35.46,71.98 v1(36.88,70.56)
  BOTTOM w0.305: R6.1 36.47,73.15 36.26,72.94 34.86,72.94 v2(34.24,73.56)
  BOTTOM w0.508: R204.2 v2(53.95,51.98) ; v2(53.95,55.56) 55.23,55.56 55.88,54.91 C205.1 ; R33.2 21.03,22.33 v2(20.42,22.33) ; v2(28.3,51.35) 28.47,51.51 R58.2 ; v2(20.32,104.65) 20.52,104.85 R25.2 ; v2(20.42,84.33) 21.03,84.33 R7.2 ; v2(22.05,55.98) 22.86,56.79 R78.1 R77.1 ; R208.1 21.44,65.55 v1(21.44,66.45) ; R50.2 v2(20.32,42.65) ; C58.1 29.15,22.99 ; C76.1 29.15,32.33 ; C18.1 29.05,85.19
  vias: v1(22.31,63.25) v1(22.25,62.03) v1(23.47,63.25) v1(37.77,67.87) v1(37.77,66.65) v1(37.77,54.5) v1(37.77,53.28) v1(38.98,67.87) v1(38.98,66.65) v1(38.98,54.5) v1(38.98,53.28) v2(0.85,114.9) v2(0.85,112.9) v2(0.85,110.9) v2(0.85,108.9) v2(0.85,106.9) v2(0.85,104.9) v2(0.85,102.9) v2(0.85,100.9) v2(0.85,98.9) v2(0.85,96.9) v2(0.85,94.9) v2(0.85,92.9) v2(0.85,90.9) v2(0.85,88.9) v2(0.85,86.9) v2(0.85,84.9) v2(0.85,82.9) v2(0.85,80.9) v2(0.85,78.9) v2(0.85,76.9) v2(0.85,74.9) v2(0.85,72.9) v2(0.85,70.9) v2(0.85,68.9) v2(0.85,66.9) v2(0.85,64.9) v2(0.85,62.9) v2(0.85,60.9) v2(0.85,58.9) v2(0.85,56.9) v2(0.85,54.9) v2(0.85,52.9) v2(0.85,50.9) v2(0.85,48.9) v2(0.85,46.9) v2(0.85,44.9) v2(0.85,42.9) v2(0.85,40.9) v2(0.85,38.9) v2(0.85,36.9) v2(0.85,34.9) v2(0.85,32.9) v2(0.85,30.9) v2(0.85,28.9) v2(0.85,26.9) v2(0.85,24.9) v2(0.85,22.9) v2(0.85,20.9) v2(0.85,18.9) v2(0.85,16.9) v2(0.85,14.9) v2(0.85,12.9) v2(0.85,10.9) v2(0.85,8.9) v2(0.85,6.9) v2(0.85,4.9) v2(0.85,2.9) v2(1.4,117) v2(1.73,69.6) v2(1.73,68.58) v2(1.83,34.44) v2(1.83,33.43) v2(1.83,24.79) v2(1.83,23.77) v2(1.93,50.5) v2(1.93,49.48) v2(2.03,85.55) v2(2.03,84.53) v2(2.1,2) v2(2.64,107.8) v2(3.6,117.1) v2(4,2.1) v2(5.7,2) v2(5.9,117.1) v2(7.9,118.06) v2(8,0.94) v2(9.45,114.81) v2(9.7,118.15) v2(9.7,0.85) v2(11.7,118.15) v2(11.7,0.85) v2(13.7,118.15) v2(13.7,0.85) v2(15.24,20.02) v2(15.24,19.1) v2(15.24,18.19) v2(15.24,17.27) v2(15.24,16.36) v2(15.65,101.6) v2(15.65,100.69) v2(15.65,99.77) v2(15.7,118.15) v2(15.7,0.85) v2(16.26,19.1) v2(16.26,18.19) v2(16.26,17.27) v2(16.26,16.36) v2(16.56,101.6) v2(16.56,100.69) v2(16.56,99.77) v2(17.37,19.1) v2(17.37,18.19) v2(17.37,17.27) v2(17.37,16.36) v2(17.48,101.6) v2(17.48,100.69) v2(17.48,99.77) v2(17.7,118.15) v2(17.7,0.85) v2(18.39,101.6) v2(18.39,100.69) v2(18.39,99.77) v2(18.39,98.86) v2(18.39,97.94) v2(18.39,97.03) v2(18.39,82.01) v2(18.39,81.1) v2(18.39,80.19) v2(18.39,79.27) v2(18.39,78.36) v2(18.39,77.44) v2(18.39,76.53) v2(18.39,75.61) v2(18.39,41.43) v2(18.39,40.51) v2(18.39,39.6) v2(18.39,38.69) v2(18.39,37.77) v2(18.39,36.86) v2(18.39,35.94) v2(18.39,21.34) v2(18.39,20.01) v2(18.39,19.1) v2(18.39,18.19) v2(18.39,17.27) v2(18.39,16.36) v2(18.39,15.34) v2(19.3,101.6) v2(19.3,100.69) v2(19.3,99.77) v2(19.3,98.86) v2(19.3,97.94) v2(19.3,82.01) v2(19.3,81.1) v2(19.3,80.19) v2(19.3,79.27) v2(19.3,78.36) v2(19.3,77.44) v2(19.3,76.53) v2(19.3,41.43) v2(19.3,39.6) v2(19.3,38.69) v2(19.3,37.77) v2(19.3,36.86) v2(19.3,35.94) v2(19.3,21.34) v2(19.3,19.1) v2(19.3,18.19) v2(19.3,17.27) v2(19.3,16.36) v2(19.3,15.34) v2(19.3,14.32) v2(19.7,118.15) v2(19.7,0.85) v2(21.7,118.15) v2(21.7,0.85) v2(23.47,2.03) v2(23.7,118.15) v2(23.7,0.85) v2(25.7,118.15) v2(25.7,0.85) v2(27.64,109.83) v2(27.64,108.81) v2(27.64,107.8) v2(27.64,106.78) v2(27.64,105.77) v2(27.64,47.83) v2(27.64,46.81) v2(27.64,45.8) v2(27.64,44.78) v2(27.64,43.77) v2(27.7,118.15) v2(27.7,0.85) v2(28.36,94.33) v2(28.36,93.31) v2(28.36,92.3) v2(28.36,91.28) v2(28.36,90.27) v2(28.36,89.25) v2(28.36,88.23) v2(28.36,87.22) v2(28.36,86.2) v2(28.36,74.17) v2(28.36,73.25) v2(28.36,72.44) v2(28.36,71.53) v2(28.36,70.51) v2(28.36,69.49) v2(28.36,30.3) v2(28.36,29.28) v2(28.36,28.27) v2(28.36,27.25) v2(28.36,26.23) v2(28.36,25.22) v2(28.36,24.2) v2(28.36,23.19) v2(28.36,11.83) v2(28.36,10.81) v2(28.36,9.8) v2(28.36,8.78) v2(28.36,7.77) v2(28.65,109.83) v2(28.65,105.77) v2(28.65,43.77) v2(29.37,94.33) v2(29.37,93.31) v2(29.37,92.3) v2(29.37,91.28) v2(29.37,90.27) v2(29.37,89.25) v2(29.37,88.23) v2(29.37,87.22) v2(29.37,86.2) v2(29.37,30.3) v2(29.37,29.28) v2(29.37,28.27) v2(29.37,27.25) v2(29.37,26.23) v2(29.37,25.22) v2(29.37,24.2) v2(29.37,23.19) v2(29.37,11.83) v2(29.37,10.81) v2(29.37,9.8) v2(29.37,8.78) v2(29.37,7.77) v2(29.57,2.03) v2(29.7,118.15) v2(29.7,0.85) v2(30.18,5.49) v2(31.7,118.15) v2(31.7,0.85) v2(33.12,103.63) v2(33.22,93.57) v2(33.22,15.44) v2(33.7,118.15) v2(33.7,0.85) v2(33.83,4.57) v2(34.24,103.63) v2(34.24,93.57) v2(34.34,15.44) v2(35.56,26.92) v2(35.7,118.15) v2(35.7,0.85) v2(36.58,2.64) v2(37.59,6.3) v2(37.7,118.15) v2(37.7,0.85) v2(37.8,75.9) v2(39.7,118.15) v2(39.7,0.85) v2(41.7,118.15) v2(41.7,0.85) v2(43.28,3.96) v2(43.7,118.15) v2(43.7,0.85) v2(43.89,108.81) v2(45.7,118.15) v2(45.7,0.85) v2(47.7,118.15) v2(47.7,0.85) v2(49.48,4.98) v2(49.7,118.15) v2(49.7,0.85) v2(51.7,118.15) v2(51.7,0.85) v2(52.12,102.72) v2(53.7,118.15) v2(53.7,0.85) v2(53.95,97.54) v2(55.47,13.82) v2(55.47,3.15) v2(55.7,118.15) v2(55.7,0.85) v2(55.98,115.42) v2(56.18,8.33) v2(56.79,45.78) v2(56.79,44.87) v2(56.79,20.73) v2(57,75.08) v2(57,73.25) v2(57.7,118.15) v2(57.7,0.85) v2(59.03,60.66) v2(59.64,12.8) v2(59.7,118.15) v2(59.7,0.85) v2(60.35,84.02) v2(60.86,19.2) v2(61.7,118.15) v2(61.7,0.85) v2(61.87,109.93) v2(63.2,117.1) v2(63.67,114.9) v2(63.67,112.9) v2(63.67,110.9) v2(63.67,108.9) v2(63.67,106.9) v2(63.67,104.9) v2(63.67,102.9) v2(63.67,100.9) v2(63.67,98.9) v2(63.67,96.9) v2(63.67,94.9) v2(63.67,92.9) v2(63.67,90.9) v2(63.67,88.9) v2(63.67,86.9) v2(63.67,84.9) v2(63.67,82.9) v2(63.67,80.9) v2(63.67,78.9) v2(63.67,76.9) v2(63.67,74.9) v2(63.67,72.9) v2(63.67,70.9) v2(63.67,68.9) v2(63.67,66.9) v2(63.67,64.9) v2(63.67,62.9) v2(63.67,60.9) v2(63.67,58.9) v2(63.67,56.9) v2(63.67,54.9) v2(63.67,52.9) v2(63.67,50.9) v2(63.67,48.9) v2(63.67,46.9) v2(63.67,44.9) v2(63.67,42.9) v2(63.67,40.9) v2(63.67,38.9) v2(63.67,36.9) v2(63.67,34.9) v2(63.67,32.9) v2(63.67,30.9) v2(63.67,28.9) v2(63.67,26.9) v2(63.67,24.9) v2(63.67,22.9) v2(63.67,20.9) v2(63.67,18.9) v2(63.67,16.9) v2(63.67,14.9) v2(63.67,12.9) v2(63.67,10.9) v2(63.67,8.9) v2(63.67,6.9) v2(63.67,4.9) v2(63.67,2.9)
VCC3V3: length 83.7
  TOP w0.25: v1(26.21,62.79) 26.12,62.89 U7.21 ; U7.19 v1(26.21,61.89)
  TOP w0.305: R51.1 18.8,50.29 v1(18.8,50.7) 18.8,51.1 R52.1 ; v1(30.28,58.52) 30.23,58.47 R68.2 ; R67.2 29.82,59.69 v1(30.23,60.1) ; 25.1,56.08 25.1,51.82 25.85,51.06 U3.8
  TOP w0.508: R63.2 21.59,53.49 v1(21.64,53.44) 21.69,53.49 R64.2 22.45,55.27 23.27,56.08 25.6,56.08 25.81,56.29 ; R65.1 v1(26.52,67.11) ; R66.1 v1(22.25,66.34)
  L3_INNER w0.508: v1(21.64,53.44) 21.19,53 21.09,53 v1(18.8,50.7) 18.16,50.7 14.63,47.16 14.63,44.4 13.41,43.18 13.41,39.83 12.09,38.51 9.96,38.51 9.5,38.97 v2(5.28,38.97) ; v1(22.25,66.34) 22.25,65.71 21.66,65.13 19,65.13 18.29,65.84 14.02,65.84 6.35,73.51 6.35,75.03 4.6,76.79 v2(4.17,76.79)
  BOTTOM w0.305: R76.2 21.6,61.26 23.23,59.64 24.81,59.64 25.4,60.23 C84.2
  BOTTOM w0.508: R205.2 26.01,56.9 ; 22.35,64.72 21.99,64.72 R207.2 R75.2 ; D1.2 2.65,76.79 v2(4.17,76.79) ; D2.2 v2(5.28,38.97)
  vias: v2(27.13,56.79) v2(27.13,55.88)
VCC_5V: length 21.9
  TOP w0.203: U1.12 38.63,70.21 38.55,70.28 38.55,71.07 v1(38.61,71.12)
  TOP w0.25: C14.2 34.24,66.75 v1(34.44,66.95) 34.5,67.01 U1.21
  TOP w0.305: 38.2,72.95 38.2,71.53 v1(38.61,71.12)
  TOP w0.508: R1.2 31.57,61.77 v1(31.39,61.77) ; R24.1 R80.1
  BOTTOM w0.508: v1(38.61,71.12) 37.39,69.9 37.39,68.78 35.56,66.95 v1(34.44,66.95) 33.22,65.74 33.22,62.8 32.2,61.77 v1(31.39,61.77)
VCC_5V_2: length 21.2
  TOP w0.203: U2.12 38.63,57.63 v1(38.71,57.71)
  TOP w0.25: U2.21 34.5,53.64 v1(34.44,53.59)
  TOP w0.305: v1(34.44,53.59) 34.24,53.39 C52.2 ; v1(38.71,57.71) 39.22,58.22 R49.1 R79.1
  TOP w0.508: R26.2 34.06,46.61 v2(34.34,46.33)
  BOTTOM w0.508: v2(34.34,46.33) 33.53,47.14 33.53,52.67 v1(34.44,53.59) 36.33,55.47 36.47,55.47 v1(38.71,57.71)
VCC_INPUT: length 22.1
  TOP w0.25: U2.16 36.28,56.37 36.07,56.59 ; U1.16 36.63,69.85 36.22,70.26 36.12,70.26 v1(36.07,70.31)
  TOP w0.508: 55.37,46.63 54.76,46.02 D28.1 ; C21.2 34.95,71.42 v1(36.07,70.31) ; C57.2 34.3,58.83 36.07,57.06 36.07,56.53 v1(36.09,56.51) ; R69.2 v1(30.07,65.38)
  BOTTOM w0.508: v1(36.07,70.31) 36.07,69.09 34.65,67.67 33.32,67.67 31.8,66.14 30.84,66.14 v1(30.07,65.38) 28.6,66.85 27.94,66.85 26.72,68.07
  vias: v2(18.19,13.21) v2(18.19,11.68) v2(19.41,109.83) v2(19.41,107.8) v2(19.41,105.77) v2(19.41,93.47) v2(19.41,91.44) v2(19.41,89.41) v2(19.41,87.38) v2(19.41,85.34) v2(19.41,73.83) v2(19.41,72.81) v2(19.41,47.83) v2(19.41,45.8) v2(19.41,43.77) v2(19.41,31.47) v2(19.41,29.44) v2(19.41,27.41) v2(19.41,25.38) v2(19.41,23.34) v2(19.81,13.21) v2(19.81,11.68) v2(20.42,109.83) v2(20.42,107.8) v2(20.42,105.77) v2(20.42,93.47) v2(20.42,91.44) v2(20.42,89.41) v2(20.42,87.38) v2(20.42,85.34) v2(20.42,73.83) v2(20.42,72.81) v2(20.42,47.83) v2(20.42,45.8) v2(20.42,43.77) v2(20.42,31.47) v2(20.42,29.44) v2(20.42,27.41) v2(20.42,25.38) v2(20.42,23.34) v2(21.44,109.83) v2(21.44,107.8) v2(21.44,105.77) v2(21.44,93.47) v2(21.44,91.44) v2(21.44,89.41) v2(21.44,87.38) v2(21.44,85.34) v2(21.44,73.83) v2(21.44,72.81) v2(21.44,71.8) v2(21.44,70.78) v2(21.44,69.77) v2(21.44,47.83) v2(21.44,45.8) v2(21.44,43.77) v2(21.44,31.47) v2(21.44,29.44) v2(21.44,27.41) v2(21.44,25.38) v2(21.44,23.34) v2(21.54,13.21) v2(21.54,11.68) v2(21.54,10.26) v2(21.54,7.92) v2(21.54,6.2) v2(26.92,52.43) v2(40.94,59.33) v2(42.06,59.33) v2(49.58,62.48) v2(49.58,60.96)
2_BOOT1: length 4.4
  TOP w0.25: U2.25 36.63,51 36.37,50.74 35.97,50.74
  TOP w0.508: C50.2 33.78,49.58 34.28,49.58 35.45,50.74 35.97,50.74
2_BOOT2: length 3.7
  TOP w0.25: 35.34,56.3 35.34,55.95 35.64,55.64 U2.17
  TOP w0.508: 35.34,56.3 34.09,57.55 C71.2
2_CI: length 115
  L2_INNER w0.203: v1(61.14,34.5) J6.11
  BOTTOM w0.203: J7.15 37.49,115.89 37.49,114.4 38.51,113.39 50.7,113.39 61.85,102.24 61.85,92.25 62.1,92 62.1,82.72 61.64,82.27 61.64,63.12 61.85,62.92 61.85,37.64 61.95,37.54 61.95,35.31 v1(61.14,34.5)
2_CO: length 119
  L2_INNER w0.203: v1(60.53,28.5) J6.5
  BOTTOM w0.203: v1(60.53,28.5) 61.24,29.21 61.24,31.29 60.53,32 60.53,34.75 61.29,35.51 61.29,62.66 61.04,62.92 61.04,82.47 61.54,82.98 61.54,91.74 61.24,92.05 61.24,101.83 50.19,112.88 37.64,112.88 36.5,114.02 J7.16
2_COMP1: length 16.4
  TOP w0.203: v1(40.44,57.3) 40.44,57 40.13,56.69 U2.9 ; C61.2 48.84,52.76 47.83,53.77 C62.2 47.22,53.85 47.12,53.95 45.92,53.95 45.72,53.75 43.68,53.75 43.15,53.21 43.15,53.12 42.09,52.06 v1(41.76,52.06) 41.68,52.14 U2.1
  BOTTOM w0.203: v1(41.76,52.06) 40.44,53.38 v1(40.44,57.3)
2_DI: length 114.7
  L2_INNER w0.203: v1(61.85,32.5) J6.9
  BOTTOM w0.203: J7.11 41.45,115.93 50.9,115.93 53.04,113.79 53.04,113.18 63.05,103.17 63.05,33.7 v1(61.85,32.5)
2_DO: length 118.4
  L2_INNER w0.203: v1(60.53,30.5) J6.7
  BOTTOM w0.203: J7.20 35.52,111.86 49.07,111.86 60.02,100.92 60.02,91.64 60.57,91.09 60.57,85.9 59.71,85.04 59.71,62.71 60.22,62.21 60.22,57.07 60.02,56.87 60.02,31.01 v1(60.53,30.5)
2_FB1: length 11.1
  TOP w0.203: R37.2 C61.1 47.28,53.16 C64.1 45.99,52.62 R40.2 45.18,53.04 44.98,53.24 43.75,53.24 43.55,53.04 43.55,52.95 43.55,52.94 43.55,52.89 41.55,50.9 40.39,50.9 40.13,51.16 U2.32
2_ISEN1B: length 3.7
  TOP w0.203: R28.1 36.27,48.98 36.83,49.54 37.65,49.54 38.13,50.02 U2.28
2_ISEN2B: length 2.4
  TOP w0.203: U2.14 37.63,57.54 37.08,58.08 R48.1
2_LGATE1: length 44.2
  TOP w0.508: R35.2 31.64,51.96 v1(31.19,51.51)
  L3_INNER w0.508: v2(21.08,20.32) 21.08,21.59 22.74,23.25 22.74,31.58 24.89,33.73 28.75,33.73 29.26,34.24 29.26,40.74 26.52,43.48 26.52,48.46 29.26,51.21 30.26,51.21 30.56,51.51 v1(31.19,51.51)
  BOTTOM w0.508: R33.1 21.08,21 v2(21.08,20.32) 21.08,19.63 Q9.1
2_LGATE2: length 24.8
  TOP w0.508: R46.2 31.45,54.81 v1(31.19,55.07)
  L3_INNER w0.508: v1(31.19,55.07) 26.01,55.07 22.25,51.31 22.25,43.38 20.83,41.96 v2(20.83,40.82)
  BOTTOM w0.508: R50.1 20.83,41.25 v2(20.83,40.82) 20.83,40.68 Q12.1
2_PHASE1: length 81
  TOP w0.203: 23.96,20 23.96,21.35 24.65,22.05 30.99,22.05 31.09,21.95 v1(31.39,21.95) ; R28.2 v1(36.27,47.24)
  TOP w0.25: U2.23 35.02,52.64 v1(34.44,52.06)
  TOP w0.508: v1(31.82,49.6) 32.21,49.22 C50.1
  L3_INNER w0.203: v1(36.27,47.24) 36.27,44.4 32.61,40.74 32.61,31.77 30.58,29.73 30.58,22.28 30.92,21.95 v1(31.39,21.95)
  L3_INNER w0.508: v1(34.44,52.06) 34,51.62 33.84,51.62 v1(31.82,49.6) 32.27,49.16 32.33,49.16 33.22,48.26 33.22,44.3 31.39,42.47 31.39,32.61 30.28,31.5 26.72,31.5 25.73,30.5 v2(25.73,19.8)
  BOTTOM w0.508: R29.1 27.86,17.96
  vias: v2(23.07,19.8) v2(23.07,15) v2(23.96,19.8) v2(23.96,18.75) v2(23.96,17.5) v2(23.96,16.25) v2(23.96,15) v2(24.84,19.8) v2(24.84,18.75) v2(24.84,17.5) v2(24.84,16.25) v2(24.84,15) v2(25.73,18.75) v2(25.73,17.5) v2(25.73,16.25) v2(25.73,15) v2(26.61,19.8) v2(26.61,18.75) v2(26.61,17.5) v2(26.61,16.25) v2(26.61,15) v2(27.5,19.8) v2(27.5,18.75) v2(27.5,17.5) v2(27.5,16.25) v2(27.5,15)
2_PHASE2: length 58
  TOP w0.203: R48.2 36.07,58.12 v1(36.47,57.71)
  TOP w0.25: v1(34.44,55.11) 34.91,54.64 U2.19
  TOP w0.508: v1(31.39,57.55) C71.1
  L2_INNER w0.203: v1(36.47,57.71) 36.63,57.86 37.34,57.86 37.59,57.61 37.59,57 37.08,56.49 37.08,51.82 33.32,48.06 33.32,45.01 29.97,41.66 24.23,41.66 v2(23.07,40.5)
  L3_INNER w0.508: v1(31.39,57.55) 31.83,57.1 32.45,57.1 v1(34.44,55.11) 31.96,52.63 28.24,52.63 25.3,49.68 25.3,42.67 24.84,42.22 v2(24.84,40.5)
  BOTTOM w0.508: R47.1 27.98,37.52 v2(27.5,38) 27.5,37.98
  vias: v2(23.07,35.5) v2(23.96,40.5) v2(23.96,39.25) v2(23.96,38) v2(23.96,36.75) v2(23.96,35.5) v2(24.84,39.25) v2(24.84,38) v2(24.84,36.75) v2(24.84,35.5) v2(25.73,40.5) v2(25.73,39.25) v2(25.73,38) v2(25.73,36.75) v2(25.73,35.5) v2(26.61,40.5) v2(26.61,39.25) v2(26.61,38) v2(26.61,36.75) v2(26.61,35.5) v2(27.5,40.5) v2(27.5,39.25) v2(27.5,36.75) v2(27.5,35.5)
2_RI: length 114.7
  L2_INNER w0.203: v1(60.73,36.47) 60.25,36.47 60.23,36.5 J6.13
  BOTTOM w0.203: J7.19 33.53,115.85 33.53,114.5 35.66,112.37 49.68,112.37 60.63,101.42 60.63,91.85 61.04,91.44 61.04,83.39 60.43,82.78 60.43,62.82 60.73,62.51 v1(60.73,36.47)
2_RO: length 119.3
  L2_INNER w0.203: v1(60.53,26.5) 59.92,27.11 47.51,27.11 J6.3
  BOTTOM w0.203: J7.12 41.49,113.89 51.21,113.89 62.46,102.64 62.46,92.46 62.56,92.35 62.56,82.47 62.25,82.17 62.25,63.32 62.41,63.17 62.41,37.85 62.56,37.69 62.56,34.44 61.24,33.12 61.24,32.11 62.25,31.09 62.25,28.23 v1(60.53,26.5)
2_UGATE1: length 52.9
  TOP w0.508: R34.2 v1(31.26,50.54)
  L3_INNER w0.508: v2(28.14,13.92) 27.44,13.92 27.44,13.92 22.66,13.92 22.15,14.43 v2(22.15,20.73) 24.28,22.86 24.28,30.89 26.01,32.61 29.77,32.61 30.38,33.22 30.38,43.18 32.21,45.01 32.21,47.96 30.81,49.35 30.81,50.09 v1(31.26,50.54)
  BOTTOM w0.508: v2(28.14,13.92) 27.85,13.92 Q7.1 ; v2(22.15,20.73) 22.52,21.1 Q8.1
2_UGATE2: length 37.4
  TOP w0.508: R44.2 v1(31.26,56.23)
  L3_INNER w0.508: v1(31.26,56.23) 31.51,55.98 31.9,55.98 32.17,55.72 32.17,54.6 31.66,54.1 28.29,54.1 27.43,53.24 26.21,53.24 24.18,51.21 24.18,48.56 23.77,48.16 23.77,43.38 v2(22.05,41.66) 22.05,35.19 22.59,34.65 v2(28.04,34.65)
  BOTTOM w0.508: Q10.1 27.67,34.54 27.94,34.54 v2(28.04,34.65) ; v2(22.05,41.66) 22.29,41.9 Q11.1
2_VMON1: length 17.2
  TOP w0.203: U2.31 39.63,50.69 39.73,50.6 v1(39.73,49.99) 40.03,49.68 C65.2 40.51,49.39 40.76,49.39 42.97,51.6 R39.1 R40.1 ; U2.11 39.13,57.11 v1(39.22,57.2)
  BOTTOM w0.203: v1(39.73,49.99) 39.73,50.6 39.69,50.63 39.69,56.73 v1(39.22,57.2)
2_VSEN1-: length 15.8
  TOP w0.203: U2.30 39.13,49.67 39.37,49.43 39.37,48.31 39.12,48.06 38.94,48.06 R42.2 38.79,47.78 39.83,46.74 C70.1 39.83,45.92 40.46,45.29 40.46,43.77 44.2,40.03 R30.2
3_BOOT1: length 4.6
  TOP w0.25: U1.25 36.63,64.37 36.37,64.11 35.97,64.11
  TOP w0.508: C12.2 33.59,62.95 33.99,62.95 35.15,64.11 35.97,64.11
3_BOOT2: length 3.2
  TOP w0.25: 35.34,69.61 35.34,69.31 35.64,69.01 U1.17
  TOP w0.508: 35.34,69.61 34.04,70.92 C33.2
3_CI: length 42.4
  TOP w0.203: J7.6 46.5,113.97 47.29,113.18 50.29,113.18 60.35,103.12 60.35,94.05 v1(58.8,92.5)
  L2_INNER w0.203: v1(58.8,92.5) J5.11
3_CO: length 50.8
  TOP w0.203: J7.5 47.55,115.83 47.55,114.14 47.9,113.79 50.9,113.79 61.06,103.63 61.06,93.37 58.8,91.11 58.8,89 v1(59.41,88.39)
  L2_INNER w0.203: v1(59.41,88.39) 57.52,86.5 J5.5
3_COMP1: length 16.1
  TOP w0.203: C24.2 46.49,61.47 46.45,61.51 C23.2 45.85,61.95 45.31,62.48 42.67,62.48 41.25,63.91 v1(41.25,64.82) 41.25,65.33 41.07,65.51 U1.1 ; U1.9 40.13,70 40.34,70.21 v1(40.34,70.51)
  BOTTOM w0.203: v1(41.25,64.82) 41.25,65.3 41.35,65.4 41.35,69.8 40.64,70.51 v1(40.34,70.51)
3_DI: length 42.8
  TOP w0.203: J7.2 51.03,114.88 61.77,104.14 61.77,92.89 v1(59.41,90.53)
  L2_INNER w0.203: J5.9 58.5,90.5 58.52,90.53 v1(59.41,90.53)
3_DO: length 50.3
  TOP w0.203: v1(58.5,88.49) 58.16,88.83 58.16,92.93 59.54,94.31 59.54,102.82 49.78,112.57 45.42,112.57 43.48,114.5 43.48,115.9 J7.9
  L2_INNER w0.203: J5.7 57.71,88.5 57.71,88.49 v1(58.5,88.49)
3_FB1: length 7.9
  TOP w0.203: U1.32 40.13,64.52 40.64,64.01 40.64,63.54 42.19,62 R15.2 43.3,61.51 C26.1 44.65,61.7 C23.1 R12.2
3_ISEN1B: length 3.9
  TOP w0.203: R3.1 36.07,62.34 36.48,62.76 36.75,62.76 37.13,63.14 37.73,63.14 38.13,63.54 U1.28
3_ISEN2B: length 2.7
  TOP w0.203: R23.1 36.47,71.87 36.98,71.36 36.98,71.32 37.63,70.68 U1.14
3_LGATE1: length 27.5
  TOP w0.508: R10.2 v1(31.26,65.33)
  L3_INNER w0.508: v2(20.83,82.32) 20.83,76.3 24.28,72.85 24.28,67.94 26.04,66.17 26.79,66.17 28.35,64.62 30.55,64.62 v1(31.26,65.33)
  BOTTOM w0.508: R7.1 20.83,82.75 v2(20.83,82.32) 20.83,82.18 Q3.1
3_LGATE2: length 43.8
  TOP w0.508: R21.2 31.25,68.17 30.89,68.54 v1(30.89,69.8)
  L3_INNER w0.508: v2(20.83,102.82) 20.83,98.04 23.06,95.81 23.06,84.94 24.99,83.01 28.04,83.01 30.28,80.77 30.28,71.04 30.89,70.43 v1(30.89,69.8)
  BOTTOM w0.508: Q6.1 21.44,102.2 v2(20.83,102.82) 20.83,103.45 R25.1
3_PHASE1: length 53.1
  TOP w0.203: v2(23.96,77) 23.96,76.22 24.89,75.29 33.12,75.29 33.32,75.49 v1(33.53,75.49) ; R3.2 v1(36.07,60.66)
  TOP w0.25: U1.23 35.02,66.01 v1(34.44,65.43)
  TOP w0.508: v1(31.39,62.59) C12.1
  L2_INNER w0.203: v1(33.53,75.49) 33.63,75.39 34.85,75.39 35.46,74.78 35.46,74.44 35.46,66.31 37.52,64.25 37.73,64.25 38.05,63.93 38.05,62.64 v1(36.07,60.66)
  L3_INNER w0.508: v2(27.5,77) 28.56,77 29.16,76.4 29.16,69.8 30.38,68.58 31.29,68.58 v1(34.44,65.43) 32.04,63.03 31.83,63.03 v1(31.39,62.59)
  BOTTOM w0.508: R4.1 28.07,80.24
  vias: v2(23.07,82) v2(23.07,77) v2(23.96,82) v2(23.96,80.75) v2(23.96,79.5) v2(23.96,78.25) v2(24.84,82) v2(24.84,80.75) v2(24.84,79.5) v2(24.84,78.25) v2(24.84,77) v2(25.73,82) v2(25.73,80.75) v2(25.73,79.5) v2(25.73,78.25) v2(25.73,77) v2(26.61,82) v2(26.61,80.75) v2(26.61,79.5) v2(26.61,78.25) v2(26.61,77) v2(27.5,82) v2(27.5,80.75) v2(27.5,79.5) v2(27.5,78.25)
3_PHASE2: length 71.8
  TOP w0.203: v1(36.01,73.66) 36.07,73.66 36.47,73.25 R23.2 ; v1(30.99,94.89) 30.58,94.89 29.77,95.71 24.99,95.71 23.96,96.74 23.96,97.5
  TOP w0.25: U1.19 35.12,68.01 34.75,68.38 v1(34.25,68.38)
  TOP w0.508: v1(32.11,71.63) 32.61,71.12 C33.1
  L3_INNER w0.203: v1(36.01,73.66) 36.01,75.75 33.83,77.93 33.83,84.23 31.7,86.36 31.7,94.66 31.47,94.89 v1(30.99,94.89)
  L3_INNER w0.508: v1(32.11,71.63) 31.39,72.34 31.39,81.48 28.75,84.12 25.91,84.12 24.59,85.45 24.59,95.71 24.84,95.97 v2(24.84,97.7)
  BOTTOM w0.508: v1(32.11,71.63) 34.25,69.48 v1(34.25,68.38) ; R22.1 28.19,100.32
  vias: v2(23.07,102.5) v2(23.07,97.7) v2(23.96,102.5) v2(23.96,101.25) v2(23.96,100) v2(23.96,98.75) v2(23.96,97.7) v2(24.84,102.5) v2(24.84,101.25) v2(24.84,100) v2(24.84,98.75) v2(25.73,102.5) v2(25.73,101.25) v2(25.73,100) v2(25.73,98.75) v2(25.73,97.7) v2(26.61,102.5) v2(26.61,101.25) v2(26.61,100) v2(26.61,98.75) v2(26.61,97.7) v2(27.5,102.5) v2(27.5,101.25) v2(27.5,100) v2(27.5,98.75) v2(27.5,97.7)
3_RI: length 42.2
  TOP w0.203: v1(58.8,94.5) 58.8,102.34 49.17,111.96 44.55,111.96 42.5,114.02 J7.10
  L2_INNER w0.203: J5.13 47.51,95.11 58.19,95.11 v1(58.8,94.5)
3_RO: length 49.5
  TOP w0.203: J7.1 62.48,104.9 62.48,90.35 v1(59.41,87.27)
  L2_INNER w0.203: v1(59.41,87.27) 57.99,85.85 48.25,85.85 J5.3
3_UGATE1: length 32.9
  TOP w0.508: R8.2 v1(31.26,63.91)
  L3_INNER w0.508: v1(31.26,63.91) 32.21,64.85 32.21,65.74 31.39,66.55 28.24,66.55 26.66,68.14 26.66,73.84 28.04,75.22 v2(28.04,75.92) 22.94,75.92 22.06,76.8 22.06,82.91 v2(22.56,83.4)
  BOTTOM w0.508: v2(28.04,75.92) 27.55,75.92 Q2.1 ; Q1.1 v2(22.56,83.4)
3_UGATE2: length 48.5
  TOP w0.508: R19.2 32.08,70.13 v1(31.8,70.41)
  L3_INNER w0.508: v1(31.8,70.41) 32.43,70.41 33.02,71 33.02,74.27 32.51,74.78 32.51,82.19 29.46,85.24 26.92,85.24 25.91,86.26 25.91,94.37 v2(27.95,96.42) 28.65,97.12 28.65,103.12 28.14,103.63 v2(22.05,103.63)
  BOTTOM w0.508: Q4.1 27.25,96.42 v2(27.95,96.42) ; v2(22.05,103.63) 22.08,103.63 22.65,104.2 Q5.1
3_VMON1: length 13.3
  TOP w0.203: U1.31 39.63,63.9 v1(39.83,63.7) 40.03,63.5 C27.2 40.34,62.28 41.11,61.51 R15.1 R14.1 ; U1.11 v1(39.13,70.51)
  BOTTOM w0.203: v1(39.13,70.51) 40.17,69.47 40.17,64.04 v1(39.83,63.7)
3_VSEN1-: length 23.2
  TOP w0.203: U1.30 39.13,63.08 39.37,62.84 39.37,61.85 R17.2 38.79,61.2 39.83,60.16 C32.1 v1(39.83,59.44)
  L3_INNER w0.203: v1(39.83,59.44) 39.83,60.12 36.88,63.06 36.88,68.68 38,69.8 38,73.19 v1(38.51,73.7)
  BOTTOM w0.203: R6.2 37.96,73.15 v1(38.51,73.7)
AD0: length 6.8
  TOP w0.203: R72.1 R74.2 C83.2 27.29,60.91 27.03,61.18 27.03,62.89 26.53,63.39 U7.22
AD1: length 4.9
  TOP w0.203: U7.23 26.96,63.89 27.29,63.55 C81.2 R70.2 R69.1
AD2: length 6.1
  TOP w0.203: U7.25 24.61,65.37 25.43,66.19 C82.2 R73.2 R71.1
AD3: length 48.2
  TOP w0.203: RT1.1 18.97,33.73 18.8,33.73 18.42,34.11 15.68,34.11 14.33,35.46 14.33,42.67 v1(14.22,42.77) ; U7.26 24.11,65.92 24.69,66.5 R65.2 C79.2 24.69,68.58 v1(24.99,68.88)
  L2_INNER w0.203: v1(14.22,42.77) 14.22,47.96 19.91,53.64 19.91,60.52 20.93,61.53 20.93,63.67 25.2,67.94 25.2,68.68 v1(24.99,68.88)
AD4: length 34.8
  TOP w0.203: v1(23.27,68.88) C80.2 R66.2 23.27,66.5 23.61,66.15 U7.27 ; v1(18.69,84.23) 18.82,84.35 RT2.1
  L3_INNER w0.203: v1(18.69,84.23) 17.98,84.94 15.58,84.94 13.31,82.67 13.31,71.42 17.37,67.36 21.74,67.36 v1(23.27,68.88)
CLKOUT/REFIN1: length 23
  TOP w0.203: U2.5 41.47,54.14 41.56,54.24 41.94,54.24 42.77,55.07 42.77,55.48 43.28,55.99 43.28,56.59 v1(43.79,57.1) R81.1 ; R20.1 40.41,72.95 40.64,72.72 v1(40.64,72.64)
  BOTTOM w0.203: v1(40.64,72.64) 40.64,71.53 43.34,68.83 43.34,57.55 v1(43.79,57.1)
DAC2: length 21.6
  TOP w0.203: v1(38.51,49.48) 38.63,49.6 U2.29 ; v1(38.51,49.48) 38.33,49.48 R41.1 ; v1(38.51,49.48) 38.79,49.2 R42.1 ; U3.7 28.27,50.41 28.96,51.1 29.97,51.1 30.48,50.6 30.48,49.78 32.51,47.75 32.51,46.13 33.02,45.62 35.15,45.62 v1(35.46,45.92)
  BOTTOM w0.203: v1(38.51,49.48) 38.51,48.49 35.94,45.92 v1(35.46,45.92)
DAC3: length 23.6
  TOP w0.203: U3.6 28.22,49.76 28.96,50.5 v1(29.67,50.5) ; v1(33.53,60.09) 34.9,60.09 35.15,59.84 36.07,59.84 36.63,60.4 36.63,61.32 37.31,62 R16.1 37.92,62 38.2,62.28 R17.1 38.79,62.83 38.72,62.89 38.72,63.79 38.63,63.89 U1.29
  L2_INNER w0.203: v1(33.53,60.09) 33.53,56.62 29.67,52.76 v1(29.67,50.5)
DAC_SCL: length 17.7
  TOP w0.203: U7.9 20.75,60.16 20.5,59.9 20.5,56.47 19.13,55.09 19.13,53.01 19.86,52.27 22.91,52.27 23.37,51.82 23.37,50.62 23.16,50.41 U3.2 21.18,50.41 20.85,50.09 R51.2
DAC_SDA: length 17.3
  TOP w0.203: U7.8 20.12,60.89 19.84,60.6 19.84,60.22 20.06,60.01 20.06,56.6 20.02,56.56 20.02,56.56 18.69,55.24 18.69,52.83 19.68,51.84 22.76,51.84 22.96,51.64 22.96,51.29 22.74,51.06 U3.1 21.18,51.06 20.93,51.31 R52.2
DET_BAD_2: length 35.2
  TOP w0.203: U7.18 25.89,61.39 v1(26.21,61.06)
  L3_INNER w0.203: v1(26.21,61.06) 25.87,60.72 23.08,60.72 21.68,59.32 21.68,57.75 13.08,49.15 13.08,44.27 11.4,42.59 6.12,42.59 5.61,42.09 v1(4.67,42.09)
  BOTTOM w0.203: v1(4.67,42.09) 5.08,41.68 R56.2
DET_BAD_3: length 22.7
  TOP w0.203: U7.2 19.95,63.89 19.88,63.95 19.87,63.95 19.3,64.52 v1(19.3,65.84)
  L3_INNER w0.203: v1(5.69,76.81) 7.01,75.49 7.01,73.86 14.43,66.45 18.69,66.45 v1(19.3,65.84)
  BOTTOM w0.203: R54.2 5.3,77.2 v1(5.69,76.81)
